# Altium PCB PCB4.PcbDoc
Units mil, origin at the board's own origin, x right, y up, seen from the top; angles counter-clockwise.
Board outline 6000 x 4000 mil, 2 copper layers (Top Layer, Bottom Layer); 54 components, 36 nets, 214 pads, 0 vias.
Unrouted connection lines stored in the file: 130.
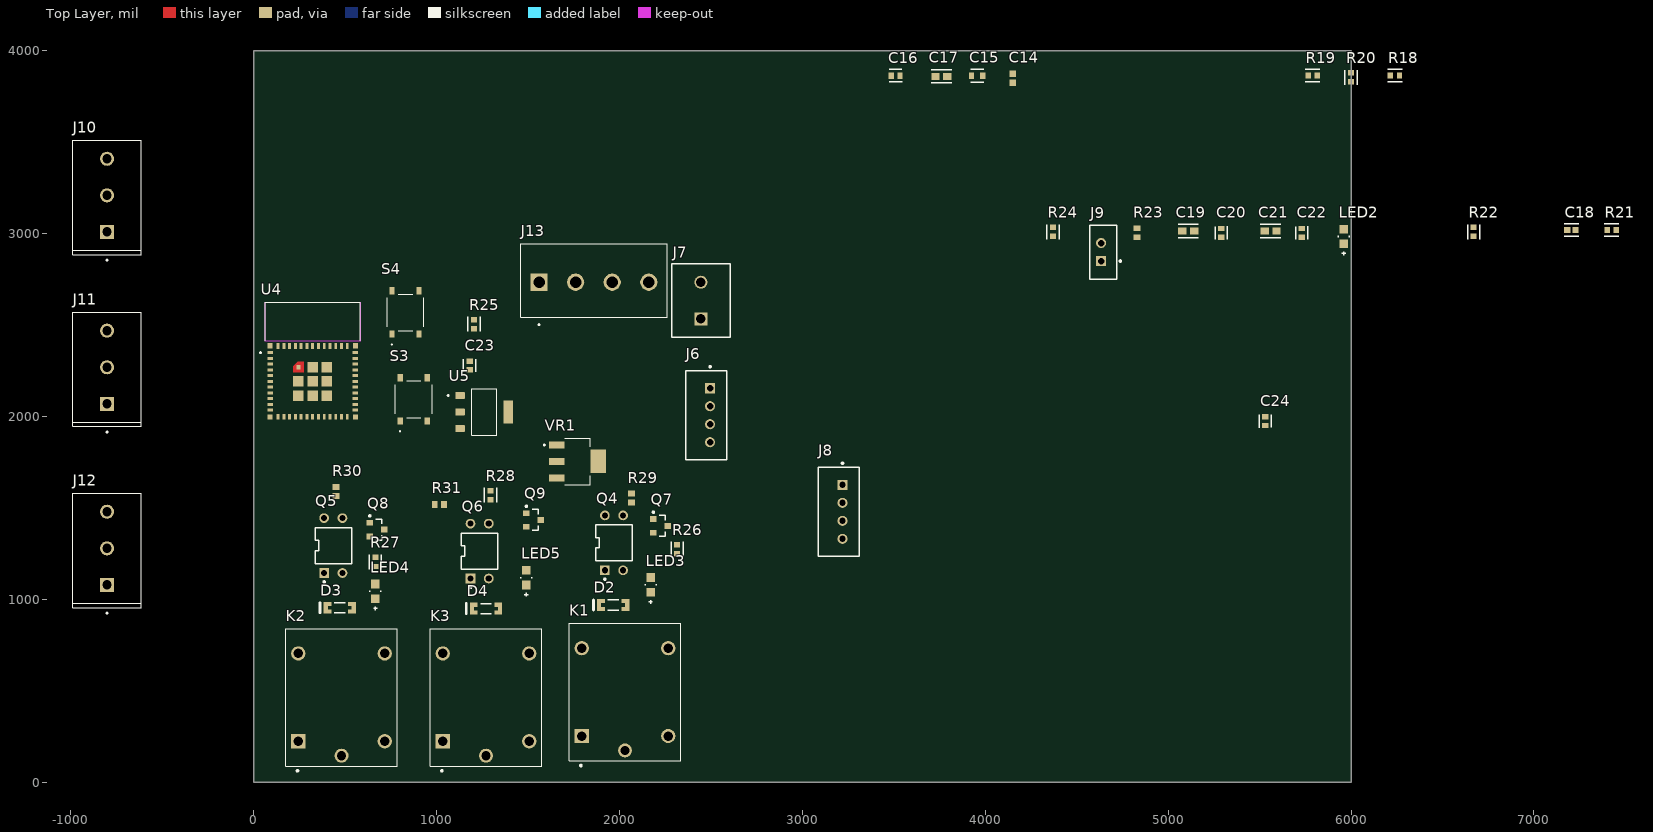
[diagram p0: Top Layer view]
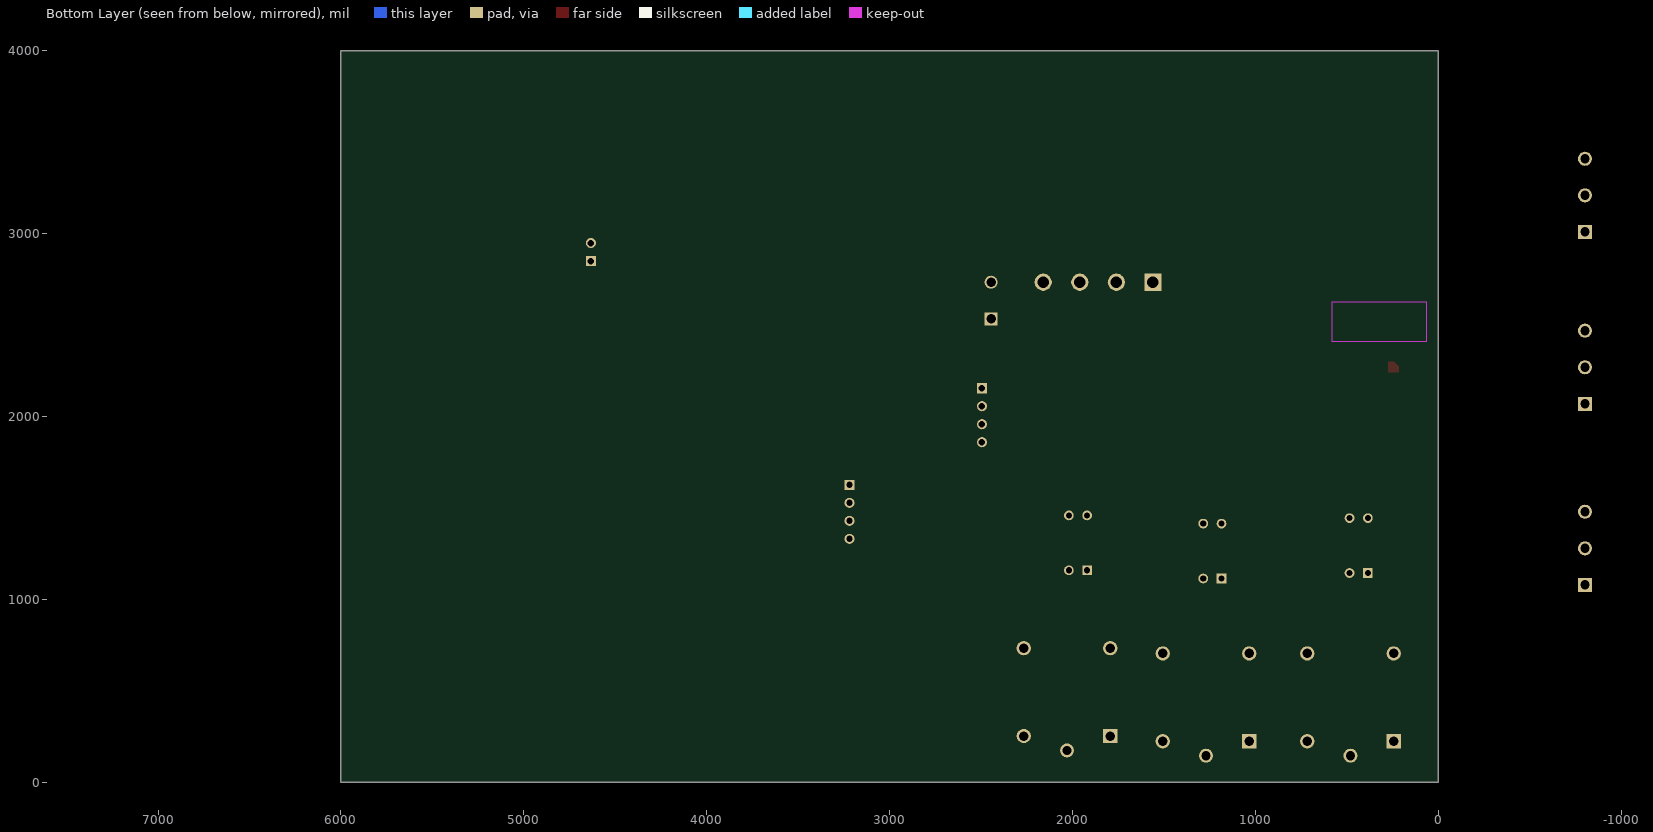
[diagram p1: Bottom Layer view, seen from below]

## Layer stack, top to bottom
Top Solder: solder mask 0.4, Solder Resist, Dk 3.5
Top Layer: signal copper 1.4
Dielectric 1: dielectric 12.6, FR-4, Dk 4.8
Bottom Layer: signal copper 1.4
Bottom Solder: solder mask 0.4, Solder Resist, Dk 3.5

## Board outline
0,0 6000,0 6000,4000 0,4000

## Design rules (kind name [scope] priority, off if disabled: settings)
Clearance [All] p1: gap=10 ignorepadtopadclearanceinfootprint=FALSE
PolygonConnect [All] p1: connectstyle=Relief reliefconductorwidth=10 reliefentries=4 polygonreliefangle="90 Angle" airgapwidth=10
RoutingVias [All] p1: holewidth=28 width=50 viastyle="Through Hole" minholewidth=28 minwidth=50 maxholewidth=28 maxwidth=50
SolderMaskExpansion [All] p1: expansion=4 istentingtop=FALSE
Width [All] p1: maxlimit=10 minlimit=10 preferedwidth=10
30 further rules are at their usual default settings.

## Components (designator, comment, footprint, x,y, rotation, side; value= is the part's Value field where it differs from the comment)
C14 "LMK107B7105KA-T" CAPC1608X90X35NL10T25 4150,3850 r90 top
C15 "GRM188R61E106MA73J" FP-GRM188-0_2-MFG 3955,3865 r0 top
C16 "C0603C104M4RAC7411" FP-C0603C-CF-MFG 3510,3865 r0 top value="0.10 μF"
C17 "CL10X106MO8NRNC" FP-CL10-IPC_A 3760,3860 r0 top
C18 "EMK107B7105KA-T" FP-0603-L_1_6_0_1-W_0_8_0-IPC_C 7205,3020 r0 top
C19 "CL10X106MO8NRNC" FP-CL10-IPC_A 5110,3015 r0 top
C20 "C0603C104M4RAC7411" FP-C0603C-CF-MFG 5290,3005 r90 top value="0.10 μF"
C21 "CL10X106MO8NRNC" FP-CL10-IPC_A 5560,3015 r0 top
C22 "C0603C104M4RAC7411" FP-C0603C-CF-MFG 5730,3005 r90 top value="0.10 μF"
C23 "C0603C104M4RAC7411" FP-C0603C-CF-MFG 1180,2280 r90 top value="0.10 μF"
C24 "C0603C104M4RAC7411" FP-C0603C-CF-MFG 5530,1975 r90 top value="0.10 μF"
D2 "LL4148" FAIR-SOD80-2_V 1965,970 r180 top
D3 "LL4148" FAIR-SOD80-2_V 470,955 r180 top
D4 "LL4148" FAIR-SOD80-2_V 1270,950 r180 top
J6 "B4B-XH-A(LF)(SN)" FP-B4B-XH-A_LF_SN-MFG 2474.33,2007.64 r90 top value=Fingerprint/Programming
J7 "1729128" PHOE-1729128-2_V 2445,2635 r90 top
J8 "B4B-XH-A(LF)(SN)" FP-B4B-XH-A_LF_SN-MFG 3198.55,1479.49 r90 top value=PushB/LED
J9 "B2B-EH-A(LF)(SN)" FP-B2B-EH-A_LF_SN-MFG 4645,2900 r90 top
J10 "MKDSN2,5/3-5.08" PHOENIX_MKDSN2,5/3-5.08 -802,3210 r90 top
J11 "MKDSN2,5/3-5.08" PHOENIX_MKDSN2,5/3-5.08 -802,2270 r90 top
J12 "MKDSN2,5/3-5.08" PHOENIX_MKDSN2,5/3-5.08 -802,1280 r90 top
J13 "TB007-508-04BE" CUI_TB007-508-04BE 1560,2735 r0 top
K1 "SRD-05VDC-SL-C" RELAY_SRD-05VDC-SL-C 2030,493.9 r90 top
K2 "SRD-05VDC-SL-C" RELAY_SRD-05VDC-SL-C 480,465 r90 top
K3 "SRD-05VDC-SL-C" RELAY_SRD-05VDC-SL-C 1270,465 r90 top
LED2 "SM0805UBWC" FP-SM0805UBWC-MFG 5960,2985 r90 top
LED3 "SM0805UBWC" FP-SM0805UBWC-MFG 2170,1080 r90 top
LED4 "SM0805UBWC" FP-SM0805UBWC-MFG 665,1044.5 r90 top
LED5 "SM0805UBWC" FP-SM0805UBWC-MFG 1490,1120 r90 top
Q4 "PC817X1J000F" FP-PC817X1J000F-MFG 1970,1310 r90 top
Q5 "PC817X1J000F" FP-PC817X1J000F-MFG 435,1295 r90 top
Q6 "PC817X1J000F" FP-PC817X1J000F-MFG 1235,1265 r90 top
Q7 "BC817-16LT1G" ONSC-SOT-23-3-318-08_V 2224.37,1402.6 r0 top
Q8 "BC817-16LT1G" ONSC-SOT-23-3-318-08_V 674.37,1382.6 r0 top
Q9 "BC817-16LT1G" ONSC-SOT-23-3-318-08_V 1530,1435 r0 top
R18 "ESR03EZPJ103" FP-ESR03-IPC_C 6240,3865 r0 top
R19 "ESR03EZPJ103" FP-ESR03-IPC_C 5790,3865 r0 top
R20 "ESR03EZPJ103" FP-ESR03-IPC_C 6000,3855 r90 top
R21 "ESR03EZPJ103" FP-ESR03-IPC_C 7425,3020 r0 top
R22 "ESR03EZPJ103" FP-ESR03-IPC_C 6670,3010 r90 top
R23 "CRCW0603510RFKEA" RESC1609X50X30NL10T20 4830,3005 r90 top
R24 "ESR03EZPJ103" FP-ESR03-IPC_C 4370,3010 r90 top
R25 "ESR03EZPJ103" FP-ESR03-IPC_C 1205,2505.32 r90 top
R26 "ESR03EZPJ103" FP-ESR03-IPC_C 2315,1275 r90 top
R27 "ESR03EZPJ103" FP-ESR03-IPC_C 665,1205.32 r90 top
R28 "ESR03EZPJ103" FP-ESR03-IPC_C 1295,1570.32 r90 top
R29 "CRCW0603510RFKEA" RESC1609X50X30NL10T20 2065,1555 r90 top
R30 "CRCW0603510RFKEA" RESC1609X50X30NL10T20 450,1590.39 r90 top
R31 "CRCW0603510RFKEA" RESC1609X50X30NL10T20 1015,1520 r0 top
S3 "TS-1187A-B-A-B" TS1187ABAB 875,2095 r90 top
S4 "TS-1187A-B-A-B" TS1187ABAB 830,2570 r90 top
U4 "ESP32-C3-MINI-1-N4" XCVR_ESP32-C3-MINI-1-N4 322.24,2299.06 r0 top
U5 "AMS1117-3.3" SOT229P700X180-4N 1260,2025 r0 top
VR1 "LM7805MP/NOPB" VREG_LM7805MP/NOPB 1770,1755 r0 top

## Footprints (in the part's own frame and the unit in brackets; to place one, negate y for a bottom-side part, rotate by r counter-clockwise, add the part's x,y. Pads: shape width x height; smd on the part's side, far side on the other; paste and mask are expansions set on the pad)
CAPC1608X90X35NL10T25 [mm] "Chip Capacitor, 2-Leads, Body 1.70x0.90mm, IPC Medium Density"
  rect 0.95x0.95 smd: 1(-0.625,0) 2(0.625,0)
  body extent -0.85,-0.45 0.85,0.45, height 0.9
CUI_TB007-508-04BE [mm]
  rect 2.4x2.4 / inner round 2.4 / far side rect 2.4x2.4 hole 1.6: 1(0,0)
  round 2.4 hole 1.6: 2(5.08,0) 3(10.16,0) 4(15.24,0)
  silkscreen extent -2.54,-6 17.78,5.35, body extent 0,-17.78 10.25,3.14, height 14
FAIR-SOD80-2_V [mm] "SOD, 2-Leads, Body 3.45x1.4mm"
  rect 0.6x1.65 smd: 1(-1.95,0) 2(1.95,0)
  rect 1.1x0.575 smd: ""(-1.7,-0.537) ""(-1.7,0.537) ""(1.7,-0.537) ""(1.7,0.537)
  silkscreen extent -0.75,-0.7 2.75,0.7, body extent -1.73,-0.7 1.73,0.7, height 2.1
FP-0603-L_1_6_0_1-W_0_8_0-IPC_C [mil]
  rect 33.77x31.97 smd paste+0 mask+0: 1(-22.72,0) 2(22.72,0)
  silkscreen extent -40,-33 40,33, body extent -44,-22 44,22, height 10
FP-B2B-EH-A_LF_SN-MFG [mm]
  rect 1.4x1.4 hole 0.9 paste-2539.97 mask+0: 1(-1.25,0.3)
  round 1.4 hole 0.9 paste-2539.97 mask+0: 2(1.25,0.3)
  silkscreen extent -3.75,-2.5 3.75,1.9, body extent -3.85,-2 3.85,2, height 0.25
FP-B4B-XH-A_LF_SN-MFG [mm]
  rect 1.4x1.4 hole 0.9 paste-2539.97 mask+0: 1(3.75,-0.525)
  round 1.4 hole 0.9 paste-2539.97 mask+0: 2(1.25,-0.525) 3(-1.25,-0.525) 4(-3.75,-0.525)
  silkscreen extent -6.2,-2.88 6.87,2.88, body extent -6.3,-2.98 6.3,2.98, height 0.25
FP-C0603C-CF-MFG [mm]
  rect 0.75x0.9 smd paste+0 mask+0: 1(-0.6,0) 2(0.6,0)
  silkscreen extent -0.87,-0.85 0.88,0.85, body extent -1.2,-0.6 1.2,0.6, height 0.25
FP-CL10-IPC_A [mil]
  rect 45.6x39.85 smd paste+0 mask+0: 1(-32.56,0) 2(32.56,0)
  silkscreen extent -55,-36 55,36, body extent -75,-40 75,40, height 10
FP-ESR03-IPC_C [mil]
  rect 29.85x31.97 smd paste+0 mask+0: 1(-24.68,0) 2(24.68,0)
  silkscreen extent -40,-33 40,33, body extent -44,-22 44,22, height 10
FP-GRM188-0_2-MFG [mm]
  rect 0.75x0.9 smd paste+0 mask+0: 1(-0.775,0) 2(0.775,0)
  silkscreen extent -0.9,-0.9 0.9,0.9, body extent -1.25,-0.6 1.25,0.6, height 0.25
FP-PC817X1J000F-MFG [mm]
  rect 1.35x1.35 hole 0.85 paste-2539.97 mask+0: 1(-3.81,1.27)
  round 1.35 hole 0.85 paste-2539.97 mask+0: 2(-3.81,-1.27) 3(3.81,-1.27) 4(3.81,1.27)
  silkscreen extent -5.17,-2.54 2.5,2.54, body extent -4.58,-2.64 4.58,2.64, height 0.25
FP-SM0805UBWC-MFG [mil]
  rect 47x47 smd paste+0 mask+0: 1(-40.5,0) 2(40.5,0)
  silkscreen extent -102,-30 3,30, body extent -68,-33 68,33, height 10
ONSC-SOT-23-3-318-08_V [mm] "SOT23, 3-Leads, Body 2.92x1.3mm, Pitch 0.95mm"
  rect 0.9x0.8 smd: 1(-1,0.95) 2(-1,-0.95) 3(1,0)
  silkscreen extent -1.12,-1.46 0.65,2.02, body extent -0.65,-1.46 0.65,1.46, height 1.11
PHOE-1729128-2_V [mm] "Receptacle, 2-Leads, Body 8.1x10.16mm, Pitch 5.08mm"
  rect 1.8x1.8 hole 1.3: 1(-2.54,0)
  round 1.8 hole 1.3: 2(2.54,0)
  silkscreen extent -5.08,-4.05 5.08,4.05, body extent -5.65,-4.05 5.08,4.05, height 10.01
PHOENIX_MKDSN2,5/3-5.08 [mm]
  rect 1.95x1.95 / inner round 1.95 / far side rect 1.95x1.95 hole 1.3: 1(-5.08,0)
  round 1.95 hole 1.3: 2(0,0) 3(5.08,0)
  silkscreen extent -9.1,-4.75 7.62,4.75, body extent -8.19,-4.75 7.62,4.75, height 15.15
RELAY_SRD-05VDC-SL-C [mm]
  rect 1.98x1.98 / inner round 1.98 / far side rect 1.98x1.98 hole 1.32: A1(-6.1,6)
  round 1.98 hole 1.32: A2(-6.1,-6) NC(6.1,6) NO(6.1,-6)
  round 1.935 hole 1.29: COM(-8.1,0)
  silkscreen extent -10.3,-7.75 9.55,7.75, body extent -9.6,-7.8 9.6,7.8, height 15.8
RESC1609X50X30NL10T20 [mm] "Chip Resistor, 2-Leads, Body 1.55x0.85mm, IPC Medium Density"
  rect 0.8x0.95 smd: 1(-0.625,0) 2(0.625,0)
  body extent -0.82,-0.48 0.82,0.48, height 0.5
SOT229P700X180-4N [mm]
  rrect15% 1.31x0.93 smd: 1(-3.345,2.29) 2(-3.345,0) 3(-3.345,-2.29)
  rrect15% 1.31x3.24 smd: 4(3.345,0)
  silkscreen extent -5.1,-3.25 1.75,3.25, body extent -3.5,-3.25 3.5,3.25, height 1.8
TS1187ABAB [mm]
  rect 1x0.75 smd: A1(-3,1.875) B1(3,1.875) C1(-3,-1.875) D1(3,-1.875)
  silkscreen extent -4.5,-2.55 2.55,2.55, body extent -3.2,-2.55 3.3,2.55, height 1.5
VREG_LM7805MP/NOPB [mm]
  rect 2.15x0.95 smd: 1(-2.9,2.3) 2(-2.9,0) 3(-2.9,-2.3)
  rect 2.15x3.25 smd: 4(2.9,0)
  silkscreen extent -4.7,-3.25 1.75,3.25, body extent -3.5,-3.25 3.5,3.25, height 1.8
XCVR_ESP32-C3-MINI-1-N4 [mm]
  rect 0.8x0.4 smd: 1(-5.9,1.3) 2(-5.9,0.5) 3(-5.9,-0.3) 4(-5.9,-1.1) 5(-5.9,-1.9) 6(-5.9,-2.7) 7(-5.9,-3.5) 8(-5.9,-4.3) 9(-5.9,-5.1) 10(-5.9,-5.9) 11(-5.9,-6.7) 25(5.9,-6.7) 26(5.9,-5.9) 27(5.9,-5.1) 28(5.9,-4.3) 29(5.9,-3.5) 30(5.9,-2.7) 31(5.9,-1.9) 32(5.9,-1.1) 33(5.9,-0.3) 34(5.9,0.5) 35(5.9,1.3)
  rect 0.4x0.8 smd: 12(-4.8,-7.6) 13(-4,-7.6) 14(-3.2,-7.6) 15(-2.4,-7.6) 16(-1.6,-7.6) 17(-0.8,-7.6) 18(0,-7.6) 19(0.8,-7.6) 20(1.6,-7.6) 21(2.4,-7.6) 22(3.2,-7.6) 23(4,-7.6) 24(4.8,-7.6) 36(4.8,2.2) 37(4,2.2) 38(3.2,2.2) 39(2.4,2.2) 40(1.6,2.2) 41(0.8,2.2) 42(0,2.2) 43(-0.8,2.2) 44(-1.6,2.2) 45(-2.4,2.2) 46(-3.2,2.2) 47(-4,2.2) 48(-4.8,2.2)
  rect 0.6x0.6 smd paste-1 mask+0: 49_1(-1.975,-0.725)
  rect 1.45x1.45 smd: 49_2(0,-0.725) 49_3(1.975,-0.725) 49_4(1.975,-2.7) 49_5(1.975,-4.675) 49_6(0,-4.675) 49_7(-1.975,-4.675) 49_8(-1.975,-2.7) 49_9(0,-2.7)
  rect 0.7x0.7 smd: 50(5.95,2.25) 51(5.95,-7.65) 52(-5.95,-7.65) 53(-5.95,2.25)
  Top Layer region: -1.25,-1.45 -2.7,-1.45 -2.7,-0.6 -2.1,0 -1.25,0
  Keep-Out Layer region: 6.6,2.9 -6.6,2.9 -6.6,8.3 6.6,8.3
  Keep-Out Layer region: 6.6,2.9 -6.6,2.9 -6.6,8.3 6.6,8.3
  silkscreen extent -7.35,1.2 6.6,8.3, body extent -6.6,-8.3 6.6,8.3, height 2.55

## Part data
C14: library part CMP-2000-05445-2, "None", Capacitance=1uF, Case Code (Imperial)=0603, Case Code (Metric)=1608, Dielectric=X7R, Max Operating Temperature=125°C, Min Operating Temperature=-55°C, Package Quantity=1, Resistor Type=Ceramic, Tolerance=10%, Voltage Rating=10V, Case/Package=0603, Construction=Flat, Depth=0.8mm, Halogen Free="Halogen Free", Height=0.8mm, Lead Free="Lead Free", Length=1.6mm, Mount="Surface Mount", Number of Pins=2, Packaging="Tape and Reel", Radiation Hardening=No, REACH SVHC="No SVHC", RoHS Compliant=Yes, Series=M, Termination=SMD/SMT, Thickness=0.035inch, Voltage Rating (DC)=10V, Width=0.031inch
C15: library part CMP-06035-029786-1, "Chip Multilayer Ceramic Capacitors for General Purpose, 0603, 10uF, X5R, 15%, 20%, 25V", Capacitance=10uF, Case Code (Imperial)=0603, Case Code (Metric)=1608, Dielectric=X5R, Max Operating Temperature=85°C, Min Operating Temperature=-55°C, Package Quantity=10000, Resistor Type=Ceramic, Tolerance=20%, Voltage Rating=25V, Case/Package=0603, Height=0.8mm, Length=0.063inch, Mount="Surface Mount", Packaging="Tape and Reel", Termination=SMD/SMT, Thickness=0.039inch, Voltage Rating (DC)=25V, Weight=0.000222oz, Width=0.031inch
C16 C20 C22 C23 C24: library part CMP-03020-016578-1, "CAP CER 0.1UF 16V X7R 0603", Capacitance="0.10 μF", Manufacturer=KEMET, Package=C0603C-CF, Temperature="-55°C to +125°C", Temperature Characteristic=X7R, Temperature Coefficient=30ppm/°C, Temperature Range High=+125°C, Temperature Range Low=-55°C, Tolerance=0.2, Voltage Rating="16 V", Automotive=Yes, Automotive Grade="Grade 1", Category=Cap, ComponentLink2Description=Datasheet, ComponentLink2URL=https://api.kemet.com/component-edge/download/datasheet/C0603C100J5GACAUTO.pdf, Device Class L1="Passive Components", Device Class L2=Capacitors, Device Class L3="Ceramic Capacitors", Digikey Description="CAP CER 0.1UF 16V X7R 0603", Height=0.87mm, Lead Free=Yes, Manufacturer Part Number=C0603C104M4RAC7411, Material=Ceramic, Mouser Description="Multilayer Ceramic Capacitors MLCC - SMD/SMT 16volts 0.1uF X7R 20%", Octopart=https://octopart.com/c0603c104m4rac7411-kemet-9138805, RoHS=TRUE
C17 C19 C21: library part CMP-13271-003287-1, "Cap Ceramic 10uF 16V X6S ±20% Pad SMD 0603 +105°C T/R", Capacitance=10uF, Case Code (Imperial)=0603, Case Code (Metric)=1608, Max Operating Temperature=105°C, Min Operating Temperature=-55°C, Tolerance=20%, Voltage Rating=16V, Case/Package=0603, Length=0.063inch, Mount="Surface Mount", Packaging="Tape and Reel", Thickness=0.035inch, Width=0.031inch
C18: library part CMP-14477-000018-3, "None", Capacitance=1uF, Case Code (Imperial)=0603, Case Code (Metric)=1608, Dielectric=X7R, Max Operating Temperature=125°C, Min Operating Temperature=-55°C, Package Quantity=1, Resistor Type=Ceramic, Tolerance=10%, Voltage Rating=16V, Case/Package=0603, Construction=Flat, Contact Plating=Nickel, Depth=0.8mm, Halogen Free="Halogen Free", Height=0.8mm, Lead Free="Lead Free", Length=1.6mm, Mount="Surface Mount", Number of Pins=2, Packaging="Tape and Reel", Radiation Hardening=No, REACH SVHC="No SVHC", RoHS Compliant=Yes, Series=M, Termination=SMD/SMT, Thickness=0.035inch, Voltage Rating (DC)=16V, Width=0.031inch
D2 D3 D4: library part CMP-2000-05115-2, "Small Signal Diode, 100 V, 0.2 A, -55 to 175 degC, 2-Pin SOD80, RoHS, Tape and Reel", Average Forward Current-Max=200mA, Forward Voltage=1V, Manufacturer=Fairchild, Power Dissipation=500mW, Reverse Voltage-Max [Vrrm]=100V, Datasheet URL=https://www.fairchildsemi.com/datasheets/LL/LL4148.pdf, Datasheet Version="Rev. 1.8, 01/2016", Manufacturer URL=https://www.fairchildsemi.com/, Reverse Recovery Time-Max=1ns
J6 J8: library part CMP-17439-000250-1, "CONN HEADER VERT 4POS 2.5MM", Color=Natural, Contact Resistance=20mR, Current Rating=3A, Flammability Rating="UL94 V-0", Housing Color=White, Insulation Resistance=1GR, Max Operating Temperature=85°C, Max Voltage Rating (AC)=250V, Min Operating Temperature=-25°C, Package Quantity=500, Connector Type=Header, Contact Finish - Mating=TIN, Contact Material=Brass, Contact Plating=Tin, Contact Shape=Square, Contact Type="Male Pin", Depth=5.75mm, Fastening Type=Detent, Gender=Male, Housing Material=Polyamide, Insulation Color=Natural, Insulation Material=Nylon, Lead Free="Lead Free", Lead Pitch=2.5mm, Length=12.4mm, Mated Stacking Heights=9.8mm, Material=Polyamide, Max Current Rating=3A, Max Voltage Rating (DC)=250V, Mount="Through Hole", Number of Contacts=4, Number of Positions=4, Number of Rows=1, Orientation=Straight, Packaging=Bulk, Pitch=2.5mm, REACH SVHC="No SVHC", Series=XH, Termination=Solder, Voltage Rating=250V, Voltage Rating (AC)=250V, Wire/Cable Gauge=22AWG
J7: library part CMP-2000-05815-1, "PCB Terminal Block, 13.5 A, 400 V, 2-Pin THD, RoHS, Bulk", Current Rating=13500mA, Manufacturer="Phoenix Contact", Package Description="2-Pin Through Hole Device, Body 8.1 x 10.16 mm, Pitch 5.08 mm", Package Reference=1729128-2, Package Version=03/2015, Voltage Rating=400V, Datasheet URL=https://datasheet.ciiva.com/16046/1729128-16046181.pdf, Datasheet Version=12/2013, Manufacturer URL=http://www.phoenixcontact.com/, Mounting Technology=ThroughHole, No. of Positions=2, No. of Rows=1, Orientation=Horizontal, Package URL=https://www.phoenixcontact.com/online/portal/pi/pxc/product_detail_page/!ut/p/b1/3VdJjqNKFDxLH8AFycySyWY2ozFsEPOMMQaDOX1XedGL_1Vdm5YXJleknhSKeBkvI6EA8ncAo3AYoDhBQGco6KN7VURTdemj9us_IEKEZo_YHiPAEWEFmDGOHMORkqKYCORBZxgL7ZoaZYcbFFUZ3fqxSY6GOuxydWUuHqz1ynmMFygu583Bob0Ewr6Sd_l-5m-kAueHiB0jpRwZwe58wwtkpxtMYd_LmGcDRU02dRNEyWt6Y2ti5pSyJ_reIkzIulrqApdnbT11V5jnCKbYNCvhEM1MCpPByat_X379-iThf08CI5GfOPqfBeS3BRoBOdD55AKVv0iLwCMq-2BrzXWSGRH7pUGD9uwXQjiph3xL0DKQwdGa0JImiIOmBNOestqgwTHSSs2oOep-78apyXQBvNi8ZLaFjvjWvcaUEBu0MC6Wbe-d6mB0FAebo2lUWinqYaZs5DAYzV0RP9yitUjnGJ0iI9xhZkT42OCQNUJJhkgWINNQLP2JFP6OpMg3JCVg70jqHT0lvKOnhHf0lPuOnnLf0VPuWx6_dxwUIvwk5WMkT0kLL1mh61l2yZVSzG3pYV_bqo-mj6uMKwKwdnnW8Jh5RTOJzMOA5c-eJDaZQw4mTMPH02PvS_ZAqNVjVTo2WyYLkwH_KU1mmmG5kjRhDqPXLwwVHvVOjCM60-fpXvTDfMGW1PVFVS1r4e4yVDk4ZdNbkUHvqPqQSeian4UD39fNKmachqdJ1NJbyk8rXT9mXTvPk3oE5meulKGgiruPJek-4I9hTT6G8ZLOyRSm2RRVbThERQad5OS28hdt4YW4vG0stgYYzsWsK4_7y6DZMjJSCqri1kyiZR5vD7pwIrNR7QwPHTcLTI5qT7eRlpHrdGiupYlqQDJ7zy_CND8fWWBoLRXxk1RVcXiBQwbTD4Xi7KL-FuO94t9xaqweXzH, Packing=Bulk, Parameter 1=12v, PartNumber=1729128, Pitch=5.08mm, RoHS=TRUE
J9: library part CMP-17439-000026-1, "CONN HEADER VERT 2POS 2.5MM", Color=Natural, Contact Resistance=20mR, Current Rating=3A, Housing Color=White, Max Operating Temperature=85°C, Max Voltage Rating (AC)=250V, Min Operating Temperature=-25°C, Connector Type=Plug, Contact Material="Copper Alloy", Contact Mating Length=0.13inch, Contact Plating=Tin, Contact Type="Male Pin", Depth=3.8mm, Fastening Type=Detent, Gender=Male, Housing Material=Nylon, Lead Free="Lead Free", Length=7.5mm, Max Current Rating=3A, Mount="Through Hole", Number of Contacts=2, Number of Positions=2, Number of Rows=1, Orientation=Straight, Packaging=Bulk, Pitch=2.5mm, Series=EH, Termination=Press-Fit, Voltage Rating=250V
J10 J11 J12: "HEADER, PCB, SCREW, 5.08MM, 3WAY; Connector Type: PCB; Series: MKDSN 2, 5; Connector Mounting: PCB; Pitch Spacing: 5....", Package=None, Availability="Not in stock", Check_prices=https://www.snapeda.com/parts/MKDSN2,5/3-5.08/Phoenix+Contact/view-part/?ref=eda, MF="Phoenix Contact", MP=MKDSN2,5/3-5.08, Price=None, SnapEDA_Link=https://www.snapeda.com/parts/MKDSN2,5/3-5.08/Phoenix+Contact/view-part/?ref=snap
J13: "2 ~ 24 polos, tipo tornillo, horizontal, paso de 5.08, 24 ~ 12 (AWG), conector de bloque de terminales", Package=None, Check_prices=https://www.snapeda.com/parts/TB007-508-04BE/Same+Sky/view-part/?ref=eda, MF="Same Sky", MP=TB007-508-04BE, SnapEDA_Link=https://www.snapeda.com/parts/TB007-508-04BE/Same+Sky/view-part/?ref=snap
K1 K2 K3: "5V Trigger Relay Module For Arduino And Raspberry Pi 5V Trigger Relay Module For Arduino And Raspberry Pi", Package="NON STANDARD-5 Songle Relay", Availability="Not in stock", Check_prices=https://www.snapeda.com/parts/SRD-05VDC-SL-C/Songle+Relay/view-part/?ref=eda, MF="Songle Relay", MP=SRD-05VDC-SL-C, Price=None, SnapEDA_Link=https://www.snapeda.com/parts/SRD-05VDC-SL-C/Songle+Relay/view-part/?ref=snap
LED2 LED3 LED4 LED5: library part CMP-35283-000004-1, "LED BLUE CLEAR 0805 SMD", Case Code (Imperial)=0805, Case Code (Metric)=2012, Color=Blue, Forward Current=20mA, Forward Voltage=3.3V, Lens Color=Colorless, Max Operating Temperature=80°C, Min Operating Temperature=-30°C, Package Quantity=3000, Power Rating=100mW, Case/Package=0805, Dominant Wavelength=470nm, Height=1.1mm, Illumination Color=Blue, Lead Free="Lead Free", Length=2mm, Lens Style=Rectangular, Lens Transparency=Clear, Luminous Intensity=115mcd, Mount="Surface Mount", Number of Pins=2, Packaging="Tape and Reel", Test Current=20mA, Viewing Angle=130°, Wavelength=470nm, Width=1.2mm
Q4 Q5 Q6: library part CMP-65434-000003-1, "OPTOISOLATOR 5KV TRANS 4DIP", Case/Package=DIP, Collector Emitter Breakdown Voltage=80V, Collector Emitter Saturation Voltage=200mV, Current Transfer Ratio=600%, Forward Current=50mA, Forward Voltage=1.4V, Input Current=20mA, Isolation Voltage=5kV, Max Operating Temperature=100°C, Max Power Dissipation=200mW, Min Operating Temperature=-30°C, Package Quantity=2000, Reverse Breakdown Voltage=6V, Collector Emitter Voltage (VCEO)=80V, Fall Time=18000ns, Max Collector Current=50mA, Max Input Current=50mA, Mount="Through Hole", Number of Channels=1, Number of Elements=1, Number of Pins=4, Output Current per Channel=50mA, Output Voltage=80V, Packaging=Sleeve, Power Dissipation=200mW, Radiation Hardening=No, Rise Time=18000ns
Q7 Q8 Q9: library part CMP-1048-00736-1, "General Purpose Transistor, NPN Silicon, 3-Pin SOT-23, Pb-Free, Tape and Reel", Manufacturer="On Semiconductor", ComponentLink1Description="Manufacturer URL", ComponentLink1URL=http://www.onsemi.com/, ComponentLink2Description=Datasheet, ComponentLink2URL=http://www.onsemi.com/pub_link/Collateral/BC817-16LT1-D.PDF, ComponentLink3Description="Package Specification", ComponentLink3URL=http://www.onsemi.cn/pub_link/Collateral/318-08.PDF, DatasheetVersion="Rev. 12", fT Min (MHz)=100, IC Continuous (A)=0.5, Mounting Technology="Surface Mount", PackageDescription="3-Pin Small Outline Transistor, Body 2.92 x 1.3 mm, Pitch 0.95 mm", PackageReference=SOT-23-3-318-08, PackageVersion="Rev. AP, 11/2009", Packing="Tape and Reel", PartNumber=BC817-16LT1G, Polarity=NPN, RoHS=TRUE
R18 R19 R20 R21 R22 R24 R25 R26 R27 R28: library part CMP-08839-028975-1, "10kΩ ±5% 0.25W 0603 Anti-Surge Chip Resistor AEC-Q200", Case Code (Imperial)=0603, Case Code (Metric)=1608, Max Operating Temperature=155°C, Max Power Dissipation=250mW, Min Operating Temperature=-55°C, Package Quantity=5000, Resistance=10kR, Resistor Type="Thick Film", Temperature Coefficient=200ppm/°C, Tolerance=5%, Case/Package=0603, Height=0.022inch, Lead Free="Lead Free", Length=0.063inch, Mount="Surface Mount", Number of Terminations=2, Packaging="Tape and Reel", Power Rating=250mW, RoHS Compliant=Yes, Series=ESR03, Width=0.031inch
  R21 R22 R26 R27 R28: Parameter 1=1kR
R23 R29 R30 R31: library part CMP-2000-03439-1, Manufacturer="Vishay Dale", Parameter 1=510ohm, Part Number=CRCW0603510RFKEA
S3 S4: "Switch", Manufacturer_Name="XKB Connectivity", Datasheet Link=http://www.helloxkb.com/public/images/pdf/TS-1187A-X-X-X.pdf, Height=4.05mm, Manufacturer_Part_Number=TS-1187A-B-A-B
U4: "Bluetooth, WiFi 802.11b/g/n, Bluetooth v5.0 Transceiver Module 2.412GHz ~ 2.484GHz PCB Trace Surface Mount", Package="SMD-53 Espressif Systems", Check_prices=https://www.snapeda.com/parts/ESP32-C3-MINI-1-N4/Espressif+Systems/view-part/?ref=eda, MF="Espressif Systems", MP=ESP32-C3-MINI-1-N4, SnapEDA_Link=https://www.snapeda.com/parts/ESP32-C3-MINI-1-N4/Espressif+Systems/view-part/?ref=snap
U5: "Sot223/Pkg 1-Amp 3.3-Volt Low Drop Out Voltage Regulatator", Package="SOT-223 Seeed Technology", Availability="Not in stock", Check_prices=https://www.snapeda.com/parts/AMS1117-3.3/Advanced+Monolithic+Systems/view-part/?ref=eda, MF="Advanced Monolithic Systems", MP=AMS1117-3.3, Price=None, SnapEDA_Link=https://www.snapeda.com/parts/AMS1117-3.3/Advanced+Monolithic+Systems/view-part/?ref=snap
VR1: "1.5-A, 30-V, linear voltage regulator", Package="SOT-223-4 Texas Instruments", Check_prices=https://www.snapeda.com/parts/LM7805MP/NOPB/Texas+Instruments/view-part/?ref=eda, MF="Texas Instruments", MP=LM7805MP/NOPB, SnapEDA_Link=https://www.snapeda.com/parts/LM7805MP/NOPB/Texas+Instruments/view-part/?ref=snap

## Nets (pads, with @x,y where several pads share a name; then routed paths per layer and width w, separated by ;. In a path a pad name is that pad's centre, name@x,y a point inside that pad or via, vN(x,y) a via of type N, cw(c..) or ccw(c..) an arc to the next point about the centre after c; other vN are vias at no path point)
+5: C14.2 C19.1 C20.1 D2.2 D3.2 D4.2 J9.1 K1.A1 K2.A1 K3.A1 Q4.4 Q5.4 Q6.4 R26.1 R27.1 R28.1 U5.3 VR1.3
GND: C14.1 C15.2 C16.2 C17.2 C18.2 C19.2 C20.2 C21.2 C22.2 C23.2 C24.2 J6.4 J7.1 J8.4 J9.2 Q7.2 Q8.2 Q9.2 R22.2 R23.1 S3.C1 S4.C1 U4.1 U4.2 U4.11 U4.14 U4.36 U4.37 U4.38 U4.39 U4.40 U4.41 U4.42 U4.43 U4.44 U4.45 U4.46 U4.47 U4.48 U4.49_1 U4.49_2 U4.49_3 U4.49_4 U4.49_5 U4.49_6 U4.49_7 U4.49_8 U4.49_9 U4.50 U4.51 U4.52 U4.53 U5.1 VR1.2 VR1.4
NetC15_1: C15.1 J7.2 VR1.1
NetC18_1: C18.1 C23.1 R19.1 R24.1 S3.A1 U4.8
NetC24_1: C24.1 R25.1 S4.A1 U4.23
NetD2_1: D2.1 K1.A2 Q7.3
NetD3_1: D3.1 K2.A2 Q8.3
NetD4_1: D4.1 K3.A2 Q9.3
NetJ6_1: J6.1 U4.30
NetJ6_2: J6.2 U4.31
NetJ8_2: J8.2 R22.1 U4.27
NetJ8_3: J8.3 R21.2
NetJ13_1: J13.1 K1.NO
NetJ13_2: J13.2 K2.NO
NetJ13_3: J13.3 K3.NO
NetJ13_4: J13.4 K1.COM K2.COM K3.COM
NetLED2_2: LED2.2 R23.2
NetLED3_1: LED3.1 Q4.2
NetLED3_2: LED3.2 U4.18
NetLED4_1: LED4.1 Q5.2
NetLED4_2: LED4.2 U4.26
NetLED5_1: LED5.1 Q6.2
NetLED5_2: LED5.2 U4.19
NetQ4_1: Q4.1 R26.2
NetQ4_3: Q4.3 R29.2
NetQ5_1: Q5.1 R27.2
NetQ5_3: Q5.3 R30.2
NetQ6_1: Q6.1 R28.2
NetQ6_3: Q6.3 R31.2
NetQ7_1: Q7.1 R29.1
NetQ8_1: Q8.1 R30.1
NetQ9_1: Q9.1 R31.1
NetR18_1: R18.1 U4.5
NetR20_1: R20.1 U4.22
NetR21_1: R21.1 U4.6
VCC: C16.1 C17.1 C21.1 C22.1 J6.3 J8.1 LED2.1 R18.2 R19.2 R20.2 R24.2 R25.2 U4.3 U5.2
pads on no net: D2. D3. D4. J10.1 J10.2 J10.3 J11.1 J11.2 J11.3 J12.1 J12.2 J12.3 K1.NC K2.NC K3.NC S3.B1 S3.D1 S4.B1 S4.D1 U4.4 U4.7 U4.9 U4.10 U4.12 U4.13 U4.15 U4.16 U4.17 U4.20 U4.21 U4.24 U4.25 U4.28 U4.29 U4.32 U4.33 U4.34 U4.35 U5.4